# Altium PCB TIMING_MEMORY_XTAL_PROTO.PcbDoc
Units mil, origin at the board's own origin, x right, y up, seen from the top; angles counter-clockwise.
Board outline 3000 x 2300 mil, 2 copper layers (Top Layer, Bottom Layer); 17 components, 73 nets, 284 pads, 21 vias.
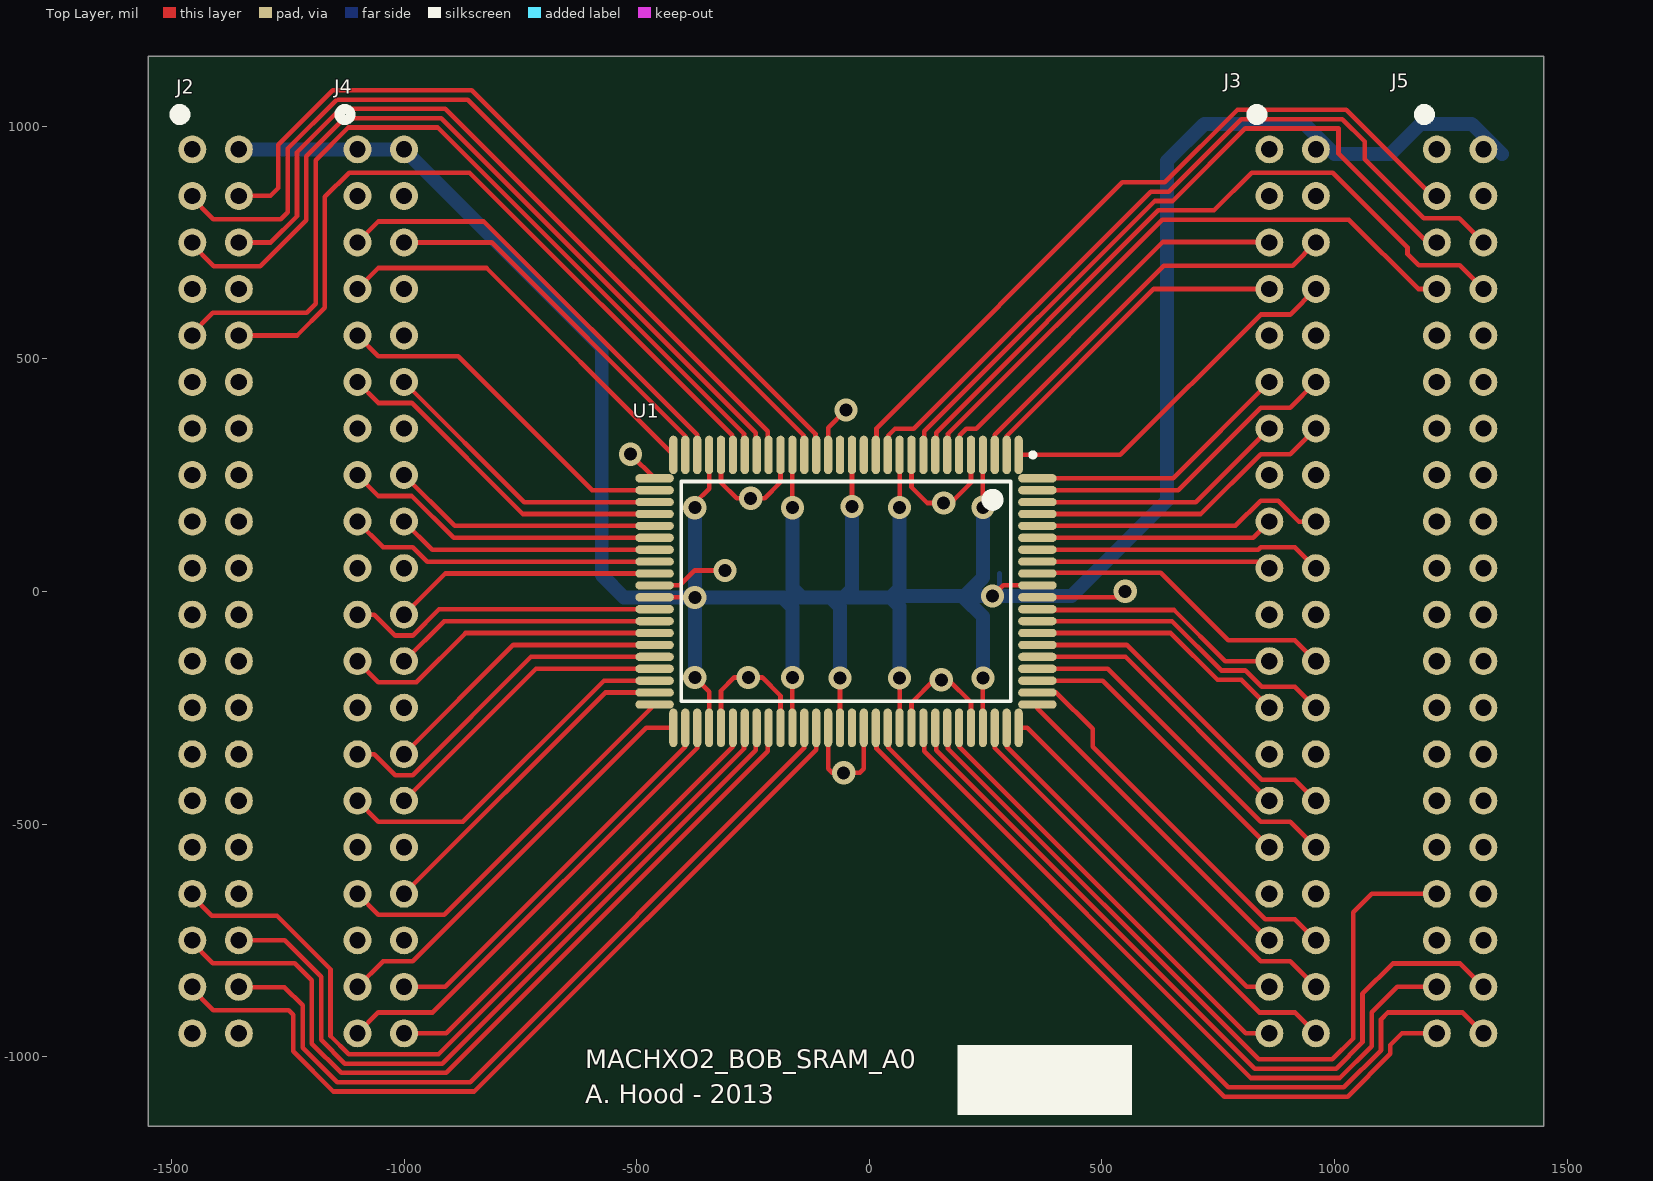
[diagram p0: Top Layer view]
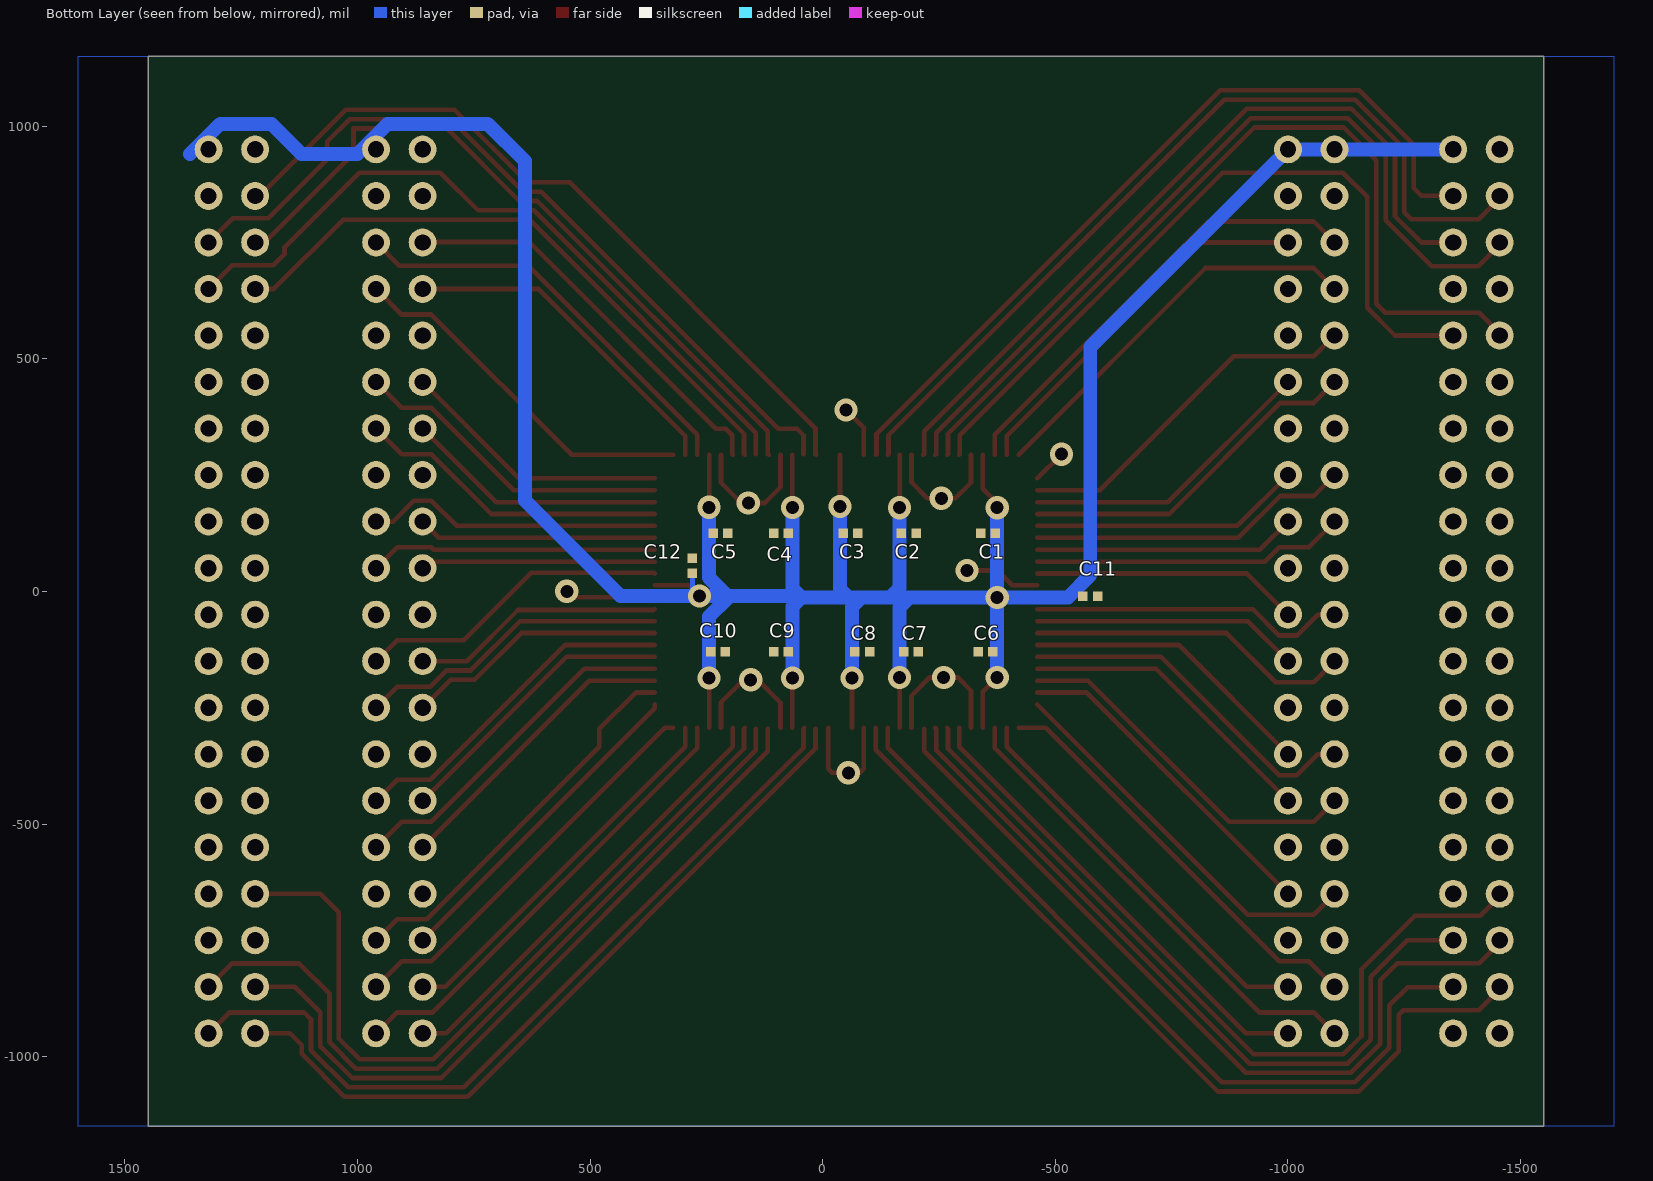
[diagram p1: Bottom Layer view, seen from below]
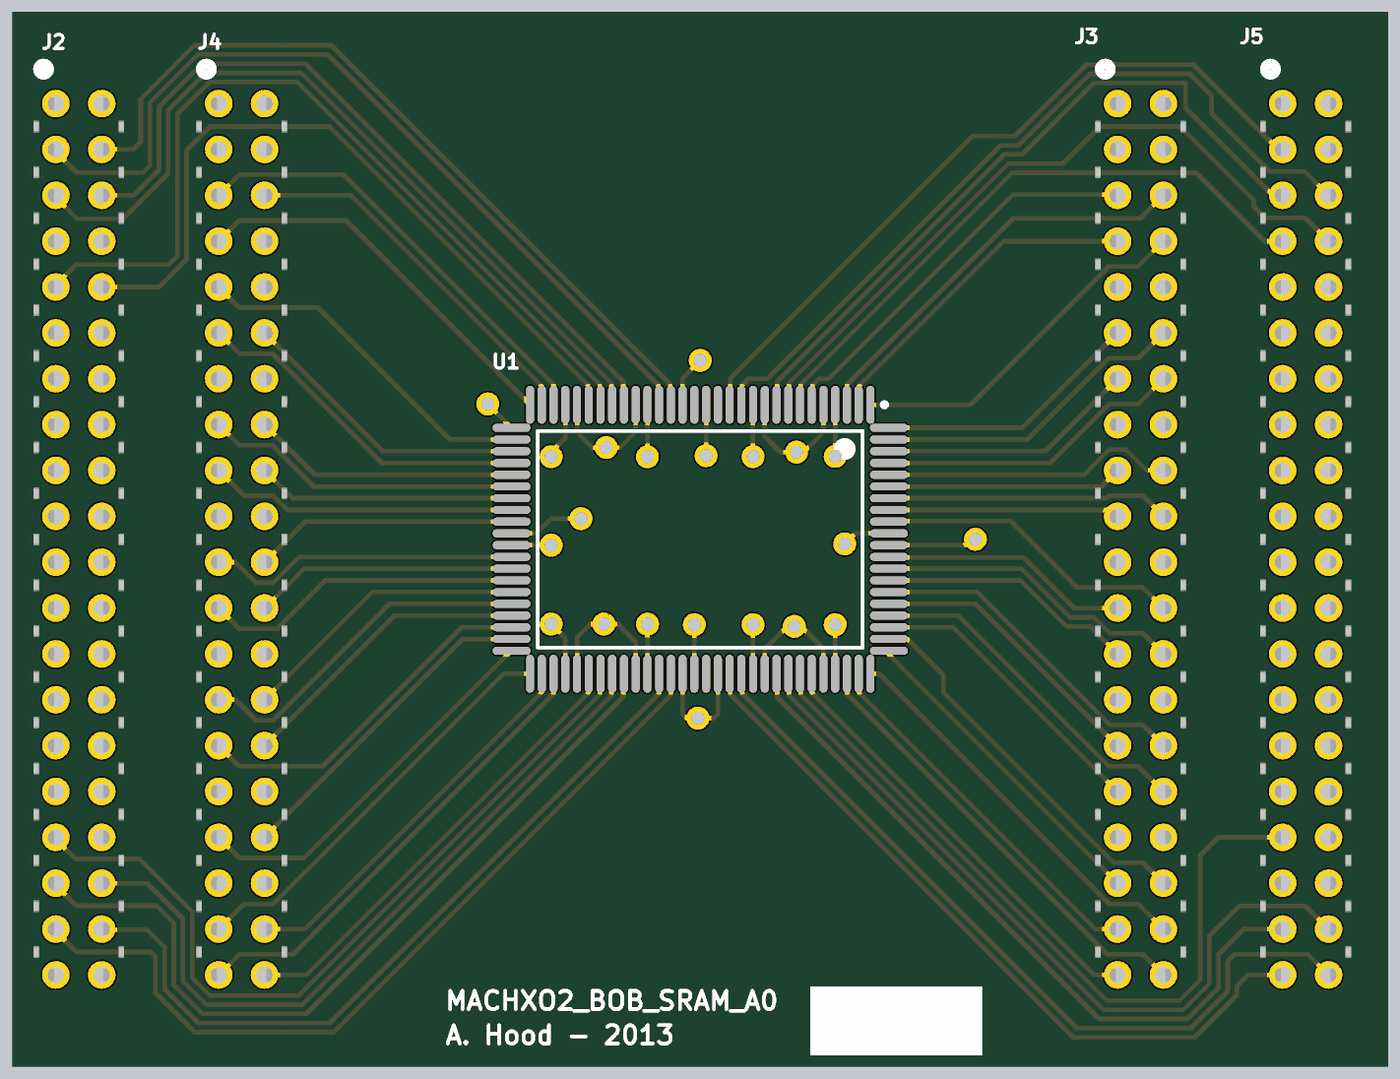
[diagram p2: 3D render of the assembled board from above, using the file's embedded part models]

## Layer stack, top to bottom
Top Layer: signal copper 1.4
Dielectric: core 12.6, FR-4, Dk 4.8
Bottom Layer: signal copper 1.4

## Board outline
-1550,1150 1450,1150 1450,-1150 -1550,-1150

## Design rules (kind name [scope] priority, off if disabled: settings)
Clearance [All] p1: gap=10
PolygonConnect [All] p1: connectstyle=Relief reliefconductorwidth=10 reliefentries=4 polygonreliefangle="90 Angle" airgapwidth=10
RoomDefinition HEADERS [InComponentClass('HEADERS')] p1: confinementstyle=ConfineIn formatcopy=TRUE lockcomponents=FALSE outline 4200.29,-2527.83 5155.29,-2527.83 5155.29,-412.83 4200.29,-412.83
RoutingVias [All] p1: holewidth=28 width=50 viastyle="Through Hole" minholewidth=28 minwidth=50 maxholewidth=28 maxwidth=50
SilkscreenOverComponentPads [All] p1: minsilkscreentomaskgap=10
SolderMaskExpansion [All] p1: expansion=4
Width [All] p1: maxlimit=10 minlimit=10 preferedwidth=10
27 further rules are at their usual default settings.

## Components (designator, comment, footprint, x,y, rotation, side; value= is the part's Value field where it differs from the comment)
C1 "CAP 100nF 10V 0402(1005)" CAPC0402(1005)60_L -355,125 r180 bottom
C2 "CAP 100nF 10V 0402(1005)" CAPC0402(1005)60_L -185,125 r0 bottom
C3 "CAP 100nF 10V 0402(1005)" CAPC0402(1005)60_L -60,125 r0 bottom
C4 "CAP 100nF 10V 0402(1005)" CAPC0402(1005)60_L 90,125 r180 bottom
C5 "CAP 100nF 10V 0402(1005)" CAPC0402(1005)60_L 220,125 r0 bottom
C6 "CAP 100nF 10V 0402(1005)" CAPC0402(1005)60_L -350,-130 r180 bottom
C7 "CAP 100nF 10V 0402(1005)" CAPC0402(1005)60_L -190,-130 r0 bottom
C8 "CAP 100nF 10V 0402(1005)" CAPC0402(1005)60_L -85,-130 r0 bottom
C9 "CAP 100nF 10V 0402(1005)" CAPC0402(1005)60_L 90,-130 r180 bottom
C10 "CAP 100nF 10V 0402(1005)" CAPC0402(1005)60_L 225,-130 r0 bottom
C11 "CAP 100nF 10V 0402(1005)" CAPC0402(1005)60_L -575,-10 r0 bottom
C12 "CAP 100nF 10V 0402(1005)" CAPC0402(1005)60_L 280,55 r270 bottom
J2 "MachXO2_BOB_J2" RECEPTACLE_25.4MM_20X2 -1455,950 r0 top
J3 "MachXO2_BOB_J3" RECEPTACLE_25.4MM_20X2 860,950 r0 top
J4 "MachXO2_BOB_J4" RECEPTACLE_25.4MM_20X2 -1100,950 r0 top
J5 "MachXO2_BOB_J5" RECEPTACLE_25.4MM_20X2 1220,950 r0 top
U1 "CY7C1480V33-167AXC" TQFP65P1600X2200X140-100N -50,0 r270 top

## Footprints (in the part's own frame and the unit in brackets; to place one, negate y for a bottom-side part, rotate by r counter-clockwise, add the part's x,y. Pads: shape width x height; smd on the part's side, far side on the other; paste and mask are expansions set on the pad)
CAPC0402(1005)60_L [mm] "Chip Capacitor, Body 1.0x0.5mm, Height 0.6mm, IPC High Density"
  rect 0.52x0.52 smd: 1(-0.4,0) 2(0.4,0)
  body extent -0.55,-0.3 0.55,0.3, height 0.6
RECEPTACLE_25.4MM_20X2 [mil]
  round 60 hole 35: 1(0,0) 2(100,0) 3(0,-100) 4(100,-100) 5(0,-200) 6(100,-200) 7(0,-300) 8(100,-300) 9(0,-400) 10(100,-400) 11(0,-500) 12(100,-500) 13(0,-600) 14(100,-600) 15(0,-700) 16(100,-700) 17(0,-800) 18(100,-800) 19(0,-900) 20(100,-900) 21(0,-1000) 22(100,-1000) 23(0,-1100) 24(100,-1100) 25(0,-1200) 26(100,-1200) 27(0,-1300) 28(100,-1300) 29(0,-1400) 30(100,-1400) 31(0,-1500) 32(100,-1500) 33(0,-1600) 34(100,-1600) 35(0,-1700) 36(100,-1700) 37(0,-1800) 38(100,-1800) 39(0,-1900) 40(100,-1900)
  silkscreen extent -39,63 -15,87, body extent -49,-1950 149,50, height 320
TQFP65P1600X2200X140-100N [mm] "TQFP, 100-Leads, Body 22.2x16.2mm (max), Pitch 0.65mm, IPC Medium Density"
  oval 2.1x0.45 smd: 1(-7.45,9.425) 2(-7.45,8.775) 3(-7.45,8.125) 4(-7.45,7.475) 5(-7.45,6.825) 6(-7.45,6.175) 7(-7.45,5.525) 8(-7.45,4.875) 9(-7.45,4.225) 10(-7.45,3.575) 11(-7.45,2.925) 12(-7.45,2.275) 13(-7.45,1.625) 14(-7.45,0.975) 15(-7.45,0.325) 16(-7.45,-0.325) 17(-7.45,-0.975) 18(-7.45,-1.625) 19(-7.45,-2.275) 20(-7.45,-2.925) 21(-7.45,-3.575) 22(-7.45,-4.225) 23(-7.45,-4.875) 24(-7.45,-5.525) 25(-7.45,-6.175) 26(-7.45,-6.825) 27(-7.45,-7.475) 28(-7.45,-8.125) 29(-7.45,-8.775) 30(-7.45,-9.425) 51(7.45,-9.425) 52(7.45,-8.775) 53(7.45,-8.125) 54(7.45,-7.475) 55(7.45,-6.825) 56(7.45,-6.175) 57(7.45,-5.525) 58(7.45,-4.875) 59(7.45,-4.225) 60(7.45,-3.575) 61(7.45,-2.925) 62(7.45,-2.275) 63(7.45,-1.625) 64(7.45,-0.975) 65(7.45,-0.325) 66(7.45,0.325) 67(7.45,0.975) 68(7.45,1.625) 69(7.45,2.275) 70(7.45,2.925) 71(7.45,3.575) 72(7.45,4.225) 73(7.45,4.875) 74(7.45,5.525) 75(7.45,6.175) 76(7.45,6.825) 77(7.45,7.475) 78(7.45,8.125) 79(7.45,8.775) 80(7.45,9.425)
  oval 0.45x2.1 smd: 31(-6.175,-10.45) 32(-5.525,-10.45) 33(-4.875,-10.45) 34(-4.225,-10.45) 35(-3.575,-10.45) 36(-2.925,-10.45) 37(-2.275,-10.45) 38(-1.625,-10.45) 39(-0.975,-10.45) 40(-0.325,-10.45) 41(0.325,-10.45) 42(0.975,-10.45) 43(1.625,-10.45) 44(2.275,-10.45) 45(2.925,-10.45) 46(3.575,-10.45) 47(4.225,-10.45) 48(4.875,-10.45) 49(5.525,-10.45) 50(6.175,-10.45) 81(6.175,10.45) 82(5.525,10.45) 83(4.875,10.45) 84(4.225,10.45) 85(3.575,10.45) 86(2.925,10.45) 87(2.275,10.45) 88(1.625,10.45) 89(0.975,10.45) 90(0.325,10.45) 91(-0.325,10.45) 92(-0.975,10.45) 93(-1.625,10.45) 94(-2.275,10.45) 95(-2.925,10.45) 96(-3.575,10.45) 97(-4.225,10.45) 98(-4.875,10.45) 99(-5.525,10.45) 100(-6.175,10.45)
  silkscreen extent -7.57,-9 6,10.33, body extent -7,-10 7,10, height 1.4

## Part data
C1 C2 C3 C4 C5 C6 C7 C8 C9 C10 C11 C12: library part CMP-1034-02064-1, "CAP 100nF 10V ±5% 0402 (1005 Metric) Thickness 0.6mm SMD"

## Via types
v1: diameter 50, hole 28, Top Layer to Bottom Layer, 21 vias

## Nets (pads, with @x,y where several pads share a name; then routed paths per layer and width w, separated by ;. In a path a pad name is that pad's centre, name@x,y a point inside that pad or via, vN(x,y) a via of type N, cw(c..) or ccw(c..) an arc to the next point about the centre after c; other vN are vias at no path point)
A0: J4.18 U1.37 | length 563.6
  Top Layer w10: J4.18 -939.57,89.57 U1.37
A1: J4.15 U1.36 | length 694.4
  Top Layer w10: J4.15 -1055,205 -983.28,205 -893.44,115.16 U1.36
A2: J4.33 U1.50 | length 844.4
  Top Layer w10: J4.33 -1055,-695 -913.31,-695 U1.50
A3: J4.34 U1.49 | length 717.7
  Top Layer w10: J4.34 -567.52,-217.52 U1.49
A4: J4.29 U1.48 | length 782.8
  Top Layer w10: J4.29 -1055,-495 -873.28,-495 -570.21,-191.93 U1.48
A5: J4.30 U1.47 | length 656.1
  Top Layer w10: J4.30 -716.34,-166.34 U1.47
A6: J4.27 U1.46 | length 762.5
  Top Layer w10: J4.27 -1063.64,-350 -1018.64,-395 -981.36,-395 -727.11,-140.75 U1.46
A7: J4.28 U1.45 | length 635.9
  Top Layer w10: J4.28 -765.16,-115.16 U1.45
A8: J4.23 U1.44 | length 700.9
  Top Layer w10: J4.23 -1055,-195 -973.28,-195 -867.85,-89.57 U1.44
A9: J4.24 U1.43 | length 574.2
  Top Layer w10: J4.24 -913.98,-63.98 U1.43
A10: J4.21 U1.42 | length 680.7
  Top Layer w10: J4.21 -1063.64,-50 -1018.64,-95 -981.36,-95 -924.75,-38.39 U1.42
A11: J4.22 U1.39 | length 575.2
  Top Layer w10: J4.22 -911.61,38.39 U1.39
A12: J4.17 U1.38 | length 674.2
  Top Layer w10: J4.17 -1045,95 -981.36,95 -950.34,63.98 U1.38
A13: J4.16 U1.35 | length 583.8
  Top Layer w10: J4.16 -890.75,140.75 U1.35
A14: J4.11 U1.34 | length 756.1
  Top Layer w10: J4.11 -1055,405 -983.28,405 -744.62,166.34 U1.34
A15: J4.12 U1.33 | length 645.5
  Top Layer w10: J4.12 -741.93,191.93 U1.33
A16: J4.9 U1.32 | length 776.3
  Top Layer w10: J4.9 -1055,505 -883.28,505 -595.8,217.52 U1.32
A17: J3.35 U1.81 | length 713.4
  Top Layer w10: U1.81 361.42,-251.42 J3.35
A18: J3.36 U1.82 | length 841.5
  Top Layer w10: U1.82 402.05,-217.52 480,-295.47 480,-333.64 851.36,-705 915,-705 J3.36
A19: J3.12 U1.99 | length 694.9
  Top Layer w10: U1.99 663.88,217.52 841.36,395 905,395 J3.12
A20: J3.11 U1.100 | length 584.3
  Top Layer w10: U1.100 653.11,243.11 J3.11
A\D\S\C\: J3.29 U1.85 | length 626.7
  Top Layer w10: U1.85 550.75,-140.75 J3.29
A\D\S\P\: J3.32 U1.84 | length 757.5
  Top Layer w10: U1.84 512.7,-166.34 841.36,-495 905,-495 J3.32
A\D\V\: J3.31 U1.83 | length 646.9
  Top Layer w10: U1.83 501.93,-191.93 J3.31
B\W\A: J3.19 U1.93 | length 504.4
  Top Layer w10: U1.93 846.02,63.98 J3.19
B\W\B: J3.20 U1.94 | length 619.5
  Top Layer w10: U1.94 835.93,89.57 841.36,95 915,95 J3.20
B\W\C: J3.17 U1.95 | length 513
  Top Layer w10: U1.95 825.16,115.16 J3.17
B\W\D: J3.18 U1.96 | length 639.7
  Top Layer w10: U1.96 787.11,140.75 841.36,195 878.64,195 923.64,150 J3.18
B\W\E\: J3.25 U1.87 | length 565
  Top Layer w10: U1.87 648,-89.57 748.43,-190 800,-190 J3.25
C\E\1: J3.13 U1.98 | length 564.1
  Top Layer w10: U1.98 701.93,191.93 J3.13
C\E\2: J3.14 U1.97 | length 674.7
  Top Layer w10: U1.97 712.7,166.34 841.36,295 905,295 J3.14
C\E\3: J3.24 U1.92 | length 678
  Top Layer w10: U1.92 363.03,40 626.57,40 771.57,-105 915,-105 J3.24
CLK: J3.23 U1.89 | length 544.8
  Top Layer w10: U1.89 363.03,-40 655,-40 765,-150 J3.23
DQA0: J4.38 U1.52 | length 858.9
  Top Layer w10: J4.38 -911.53,-850 -395.47,-333.94 U1.52
DQA1: J4.39 U1.53 | length 1027.5
  Top Layer w10: J4.39 -1055,-905 -938.25,-905 -369.88,-336.63 U1.53
DQA2: J4.40 U1.56 | length 1002.7
  Top Layer w10: J4.40 -909.17,-950 -293.11,-333.94 U1.56
DQA3: J2.33 U1.57 | length 1735.6
  Top Layer w10: J2.33@-1460,-650 -1413,-697 -1273,-697 -1158,-812 -1158,-955.64 -1118.64,-995 -925.89,-995 -269.25,-338.36 -269.25,-295.04 U1.57
DQA4: J2.36 U1.58 | length 1633.4
  Top Layer w10: J2.36@-1360,-750 -1256,-750 -1178,-828 -1178,-963.92 -1126.92,-1015 -917.6,-1015 -243.66,-341.06 -243.66,-295.04 U1.58
DQA5: J2.35 U1.59 | length 1774.6
  Top Layer w10: J2.35@-1460,-750 -1411,-799 -1235.28,-799 -1198,-836.28 -1198,-972.21 -1135.21,-1035 -909.32,-1035 -218.07,-343.75 U1.59@-218.07,-295.04
DQA6: J2.38 U1.62 | length 1697.8
  Top Layer w10: J2.38@-1359,-851 -1257,-851 -1218,-890 -1218,-980.49 -1143.49,-1055 -858,-1055 -139.57,-336.57 U1.62
DQA7: J2.37 U1.63 | length 1836.5
  Top Layer w10: J2.37@-1460,-850 -1410,-900 -1248,-900 -1238,-910 -1238,-988.78 -1151.78,-1075 -849,-1075 -113.98,-339.98 U1.63
DQB0: J3.37 U1.79 | length 818.9
  Top Layer w10: U1.79 295.47,-333.94 811.53,-850 J3.37
DQB1: J3.40 U1.78 | length 987.5
  Top Layer w10: U1.78 269.88,-336.63 838.25,-905 915,-905 J3.40
DQB2: J3.39 U1.75 | length 962.7
  Top Layer w10: U1.75 193.11,-333.94 809.17,-950 J3.39
DQB3: J5.33 U1.74 | length 1679.3
  Top Layer w10: U1.74 169.25,-295.04 169.25,-338.36 836.89,-1006 995,-1006 1040,-961 1040,-690 1080,-650 J5.33
DQB4: J5.38 U1.73 | length 1681.5
  Top Layer w10: U1.73@143.66,-295.04 143.66,-341.06 828.6,-1026 1003.28,-1026 1060,-969.28 1060,-865 1125,-800 1270,-800 J5.38
DQB5: J5.37 U1.72 | length 1565.2
  Top Layer w10: U1.72@118.07,-295.04 118.07,-343.75 820.32,-1046 1011.57,-1046 1080,-977.57 1080,-905 1135,-850 J5.37
DQB6: J5.40 U1.69 | length 1748.2
  Top Layer w10: U1.69 41.3,-295.04 41.3,-335.67 771.63,-1066 1019.85,-1066 1100,-985.85 1100,-920 1115,-905 1275,-905 J5.40
DQB7: J5.39 U1.68 | length 1624.8
  Top Layer w10: U1.68@15.71,-295.04 15.71,-338.36 763.34,-1086 1028.14,-1086 1120,-994.14 1120,-975 1145,-950 J5.39
DQC0: J3.7 U1.2 | length 736.1
  Top Layer w10: U1.2 295.47,333.94 611.54,650 J3.7
DQC1: J3.6 U1.3 | length 904.7
  Top Layer w10: U1.3 269.88,336.63 633.25,700 910,700 J3.6
DQC2: J3.5 U1.6 | length 884.8
  Top Layer w10: U1.6 194.84,295.04 194.84,335.67 208.82,349.65 229.65,349.65 631,751 849,751 J3.5@860,740
DQC3: J5.7 U1.7 | length 1349
  Top Layer w10: U1.7 169.25,295.04 169.25,338.36 629.89,799 1031,799 1180,650 J5.7
DQC4: J5.8 U1.8 | length 1565.6
  Top Layer w10: U1.8@143.66,295.04 143.66,341.06 621.6,819 741,819 822,900 996,900 1157,739 1157,725 1181,701 1269,701 J5.8
DQC5: J5.5 U1.9 | length 1535.3
  Top Layer w10: U1.9 118.07,295.04 118.07,343.75 613.32,839 652,839 808,995 1008.64,995 1008.64,940.36 J5.5@1199,750
DQC6: J5.6 U1.12 | length 1732.7
  Top Layer w10: U1.12@41.3,295.04 41.3,335.67 55.28,349.65 95.68,349.65 605.03,859 643.72,859 799.72,1015 1016.92,1015 1065,966.92 1065,929 1192.1,801.9 1268.1,801.9 J5.6
DQC7: J5.3 U1.13 | length 1612.7
  Top Layer w10: U1.13 15.71,295.04 15.71,350.71 544,879 635.43,879 791.43,1035 1025.21,1035 J5.3@1210.21,850
DQD0: J4.6 U1.29 | length 817.5
  Top Layer w10: J4.6 -811.53,750 -395.47,333.94 U1.29
DQD1: J4.5 U1.28 | length 981.9
  Top Layer w10: J4.5 -1055,795 -828.25,795 -369.88,336.63 U1.28
DQD2: J2.10 U1.25 | length 1626.4
  Top Layer w10: J2.10@-1360,550 -1230,550 -1170,610 -1170,848 -1118,900 -859.17,900 -294.84,335.67 -294.84,295.04 U1.25
DQD3: J2.9 U1.24 | length 1875.3
  Top Layer w10: J2.9@-1460,550 -1411,599 -1209.28,599 -1190,618.28 -1190,927 -1120,997 -927.89,997 -269.25,338.36 -269.25,295.04 U1.24
DQD4: J2.5 U1.23 | length 1778.1
  Top Layer w10: J2.5@-1460,750 -1409,699 -1309,699 -1210,798 -1210,935.28 -1128.28,1017 -919.6,1017 -243.66,341.06 -243.66,295.04 U1.23
DQD5: J2.6 U1.22 | length 1679.5
  Top Layer w10: J2.6@-1360,750 -1286.28,750 -1230,806.28 -1230,943.57 -1136.57,1037 -911.32,1037 -218.07,343.75 -218.07,295.04 U1.22
DQD6: J2.3 U1.19 | length 1868.1
  Top Layer w10: J2.3@-1460,850 -1410,800 -1264.57,800 -1250,814.57 -1250,951.85 -1144.85,1057 -862.63,1057 -141.3,335.67 -141.3,295.04 U1.19
DQD7: J2.4 U1.18 | length 1744.6
  Top Layer w10: J2.4@-1360,850 -1287,850 -1270,867 -1270,960.14 -1153.14,1077 -854.35,1077 -115.71,338.36 -115.71,295.04 U1.18
DQPA: J4.37 U1.51 | length 909.5
  Top Layer w10: J4.37 -1045,-795 -981.36,-795 -479.67,-293.31 U1.51
DQPB: J3.38 U1.80 | length 869.5
  Top Layer w10: U1.80 339.67,-293.31 841.36,-795 905,-795 J3.38
DQPC: J3.8 U1.1 | length 786.7
  Top Layer w10: U1.1 539.67,293.31 841.36,595 905,595 J3.8
DQPD: J4.7 U1.30 | length 864
  Top Layer w10: J4.7 -1055,695 -822.75,695 U1.30
G\W\: J3.26 U1.88 | length 675.6
  Top Layer w10: U1.88 650.69,-63.98 756.72,-170 808.28,-170 843.28,-205 915,-205 J3.26
GND: C1.1 C2.1 C3.1 C4.1 C5.1 C6.1 C7.1 C8.1 C9.1 C10.1 C11.1 C12.1 J2.7 J2.8 J2.15 J2.16 J2.23 J2.24 J2.31 J2.32 J2.39 J2.40 J3.9 J3.10 J3.15 J3.16 J3.21 J3.22 J3.27 J3.28 J3.33 J3.34 J4.13 J4.14 J4.19 J4.20 J4.25 J4.26 J4.31 J4.32 J4.36 J5.11 J5.12 J5.17 J5.18 J5.23 J5.24 J5.29 J5.30 J5.35 J5.36 U1.5 U1.10 U1.17 U1.21 U1.26 U1.31 U1.40 U1.55 U1.60 U1.64 U1.67 U1.71 U1.76 U1.90 | length 1950.6
  Top Layer w10: v1(-513.31,295) U1.31 ; U1.40 -407.2,12.8 -375,45 v1(-310,45) ; U1.55 -318.7,-213.7 -290,-185 v1(-260,-185) -230,-185 -190.75,-224.25 U1.60 ; U1.26 -318.7,233.7 -285,200 v1(-255,200) -225,200 -190.75,234.25 U1.21 ; U1.64 -88.39,-381.61 -80,-390 v1(-55,-390) -20,-390 -11.61,-381.61 U1.67 ; U1.17 -88.39,351.61 v1(-50,390) ; U1.71 90.75,-239.25 140,-190 170,-190 218.7,-238.7 U1.76 ; U1.10 90.75,224.25 125,190 v1(160,190) 175,190 218.7,233.7 U1.5 ; U1.90 537.2,-12.8 v1(550,0)
  other v1: 155,-190
O\E\: J3.30 U1.86 | length 737.3
  Top Layer w10: U1.86 553.44,-115.16 843.28,-405 915,-405 J3.30
V3P3: C1.2 C2.2 C3.2 C4.2 C5.2 C6.2 C7.2 C8.2 C9.2 C10.2 C11.2 C12.2 J2.2 J3.2 J4.1 J4.2 J4.3 J5.2 U1.4 U1.11 U1.15 U1.20 U1.27 U1.41 U1.54 U1.61 U1.65 U1.70 U1.77 U1.91 | length 7598.7
  Top Layer w10: U1.41 -461.21,-13 v1(-375,-13) ; v1(-375,-185) -344.29,-215.71 U1.54 ; v1(-375,180) -375,190 -344.29,220.71 U1.27 ; U1.61 -165.16,-185.16 v1(-165,-185) ; v1(-165.16,179.84) U1.20 ; U1.65 v1(-62.8,-186.2) ; v1(-37.2,182.2) U1.15 ; U1.70 v1(65.16,-186.16) ; v1(65.16,180.16) U1.11 ; U1.77 v1(244.29,-186.29) ; v1(244.29,180.71) U1.4 ; v1(265,-10) 287.8,12.8 U1.91
  Bottom Layer w10: v1@280,5 C12.2
  Bottom Layer w30: J2.2@-1360,950 J4.1 J4.2 -575,525 -575,35 -527,-13 v1(-375,-13) ; v1(-375,-185) v1(-375,-13) ; v1(-375,180) v1(-375,-13) ; v1(-165.16,179.84) -165.16,7.16 -145,-13 ; v1(-165,-185) -165,-35 -187,-13 ; v1(-62.8,-186.2) -62.8,-33.2 -83,-13 ; v1(-37.2,182.2) -37.2,5 -55.2,-13 ; v1(65.16,-186.16) 65.16,-32.16 46,-13 ; v1(65.16,180.16) 65.16,6.16 49,-10 ; v1(244.29,-186.29) 244.29,-54.29 205,-15 205,-10 ; v1(244.29,180.71) 244.29,29.29 205,-10 ; 1360,940 1295,1005 1185,1005 1120,940 1000,940 935,1005 720,1005 640,925 640,195 435,-10 v1(265,-10) 205,-10 ; v1(-375,-13) -187,-13 ; -187,-13 -145,-13 ; -145,-13 -83,-13 ; -83,-13 -55.2,-13 ; -55.2,-13 46,-13 ; 46,-13 49,-10 ; 49,-10 205,-10
pads on no net: J2.1 J2.11 J2.12 J2.13 J2.14 J2.17 J2.18 J2.19 J2.20 J2.21 J2.22 J2.25 J2.26 J2.27 J2.28 J2.29 J2.30 J2.34 J3.1 J3.3 J3.4 J4.4 J4.8 J4.10 J4.35 J5.1 J5.4 J5.9 J5.10 J5.13 J5.14 J5.15 J5.16 J5.19 J5.20 J5.21 J5.22 J5.25 J5.26 J5.27 J5.28 J5.31 J5.32 J5.34 U1.14 U1.16 U1.66

## Polygon pours and split planes (outlines as drawn)
GND on Bottom Layer "Bottom Layer-No Net" (solid, shelved, pour order 2): -1700,1150 -1700,-1150 1600,-1150 1600,1150

## Silkscreen, mask and mechanical layers (free items; w line width, h text height)
Top Overlay:
  rectangle: 190,-1125 565,-975
  text "MACHXO2_BOB_SRAM_A0" at -610,-1025 h40
  text "A. Hood - 2013" at -610,-1100 h40
Mechanical 1:
  the board outline again, w10